# Altium PCB CPU01(2).PcbDoc (part 1 of 2)
Units mm, origin at the board's own origin, x right, y up, seen from the top; angles counter-clockwise.
Board outline 153.03 x 96.97 mm, 4 copper layers (Top Layer, GND, VCC, Bottom Layer), stack 0.778 mm thick; 203 components, 157 nets, 813 pads, 622 vias.
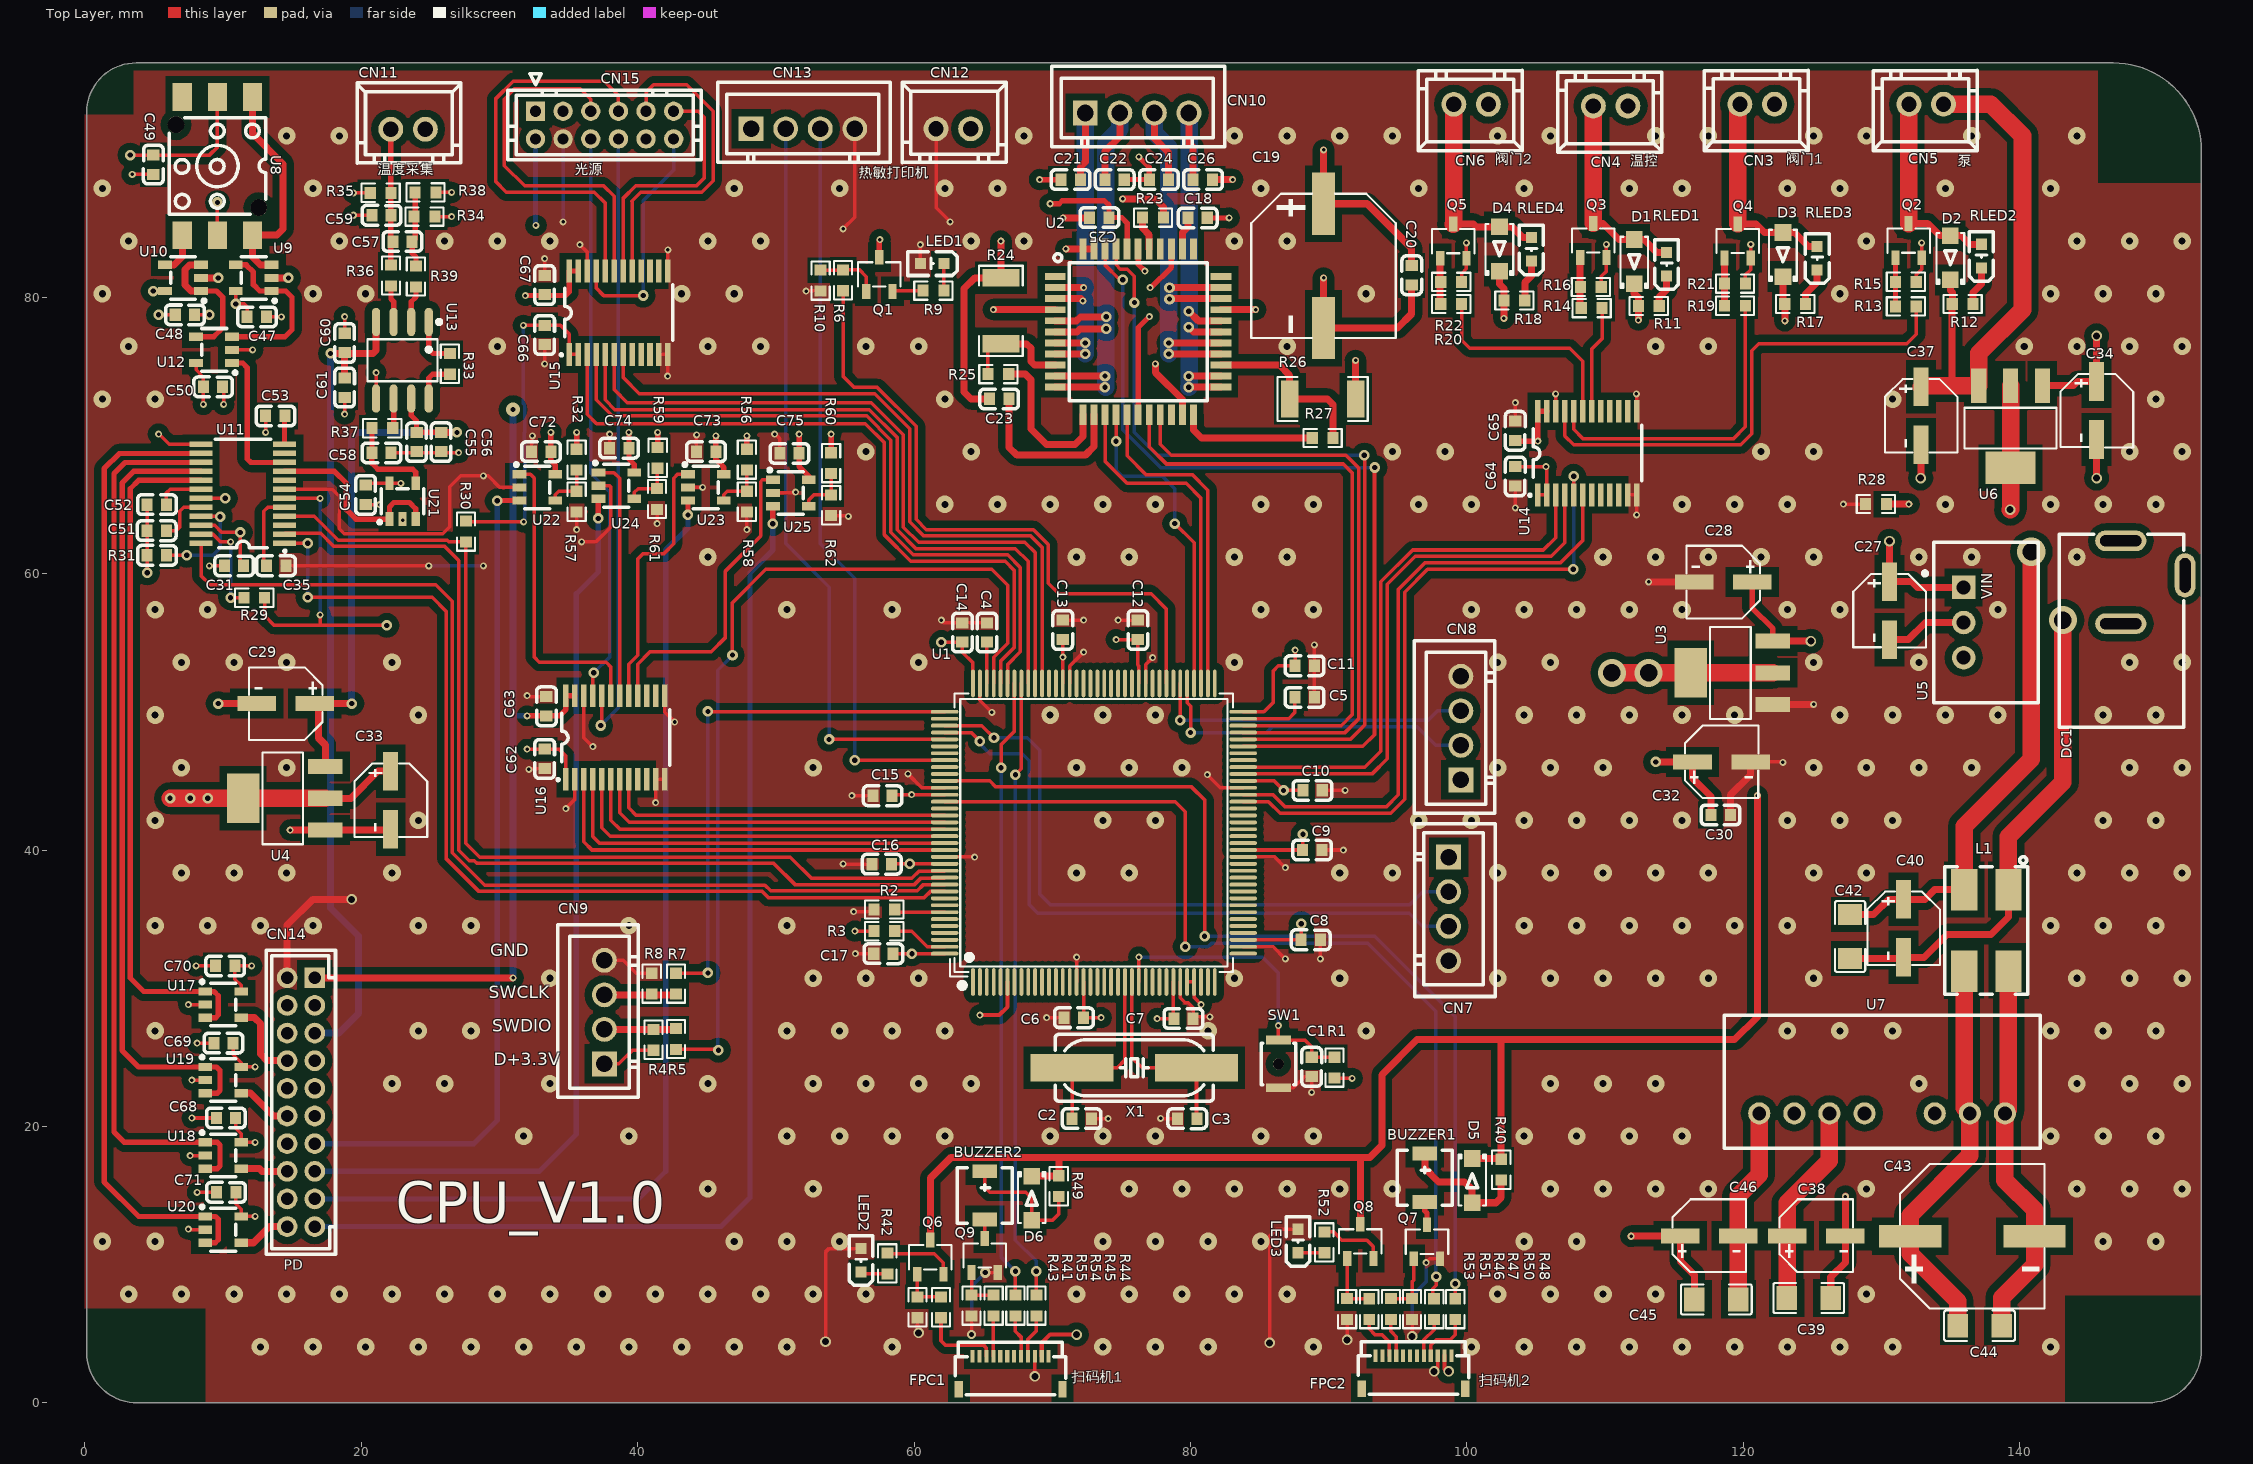
[diagram p0: Top Layer view]
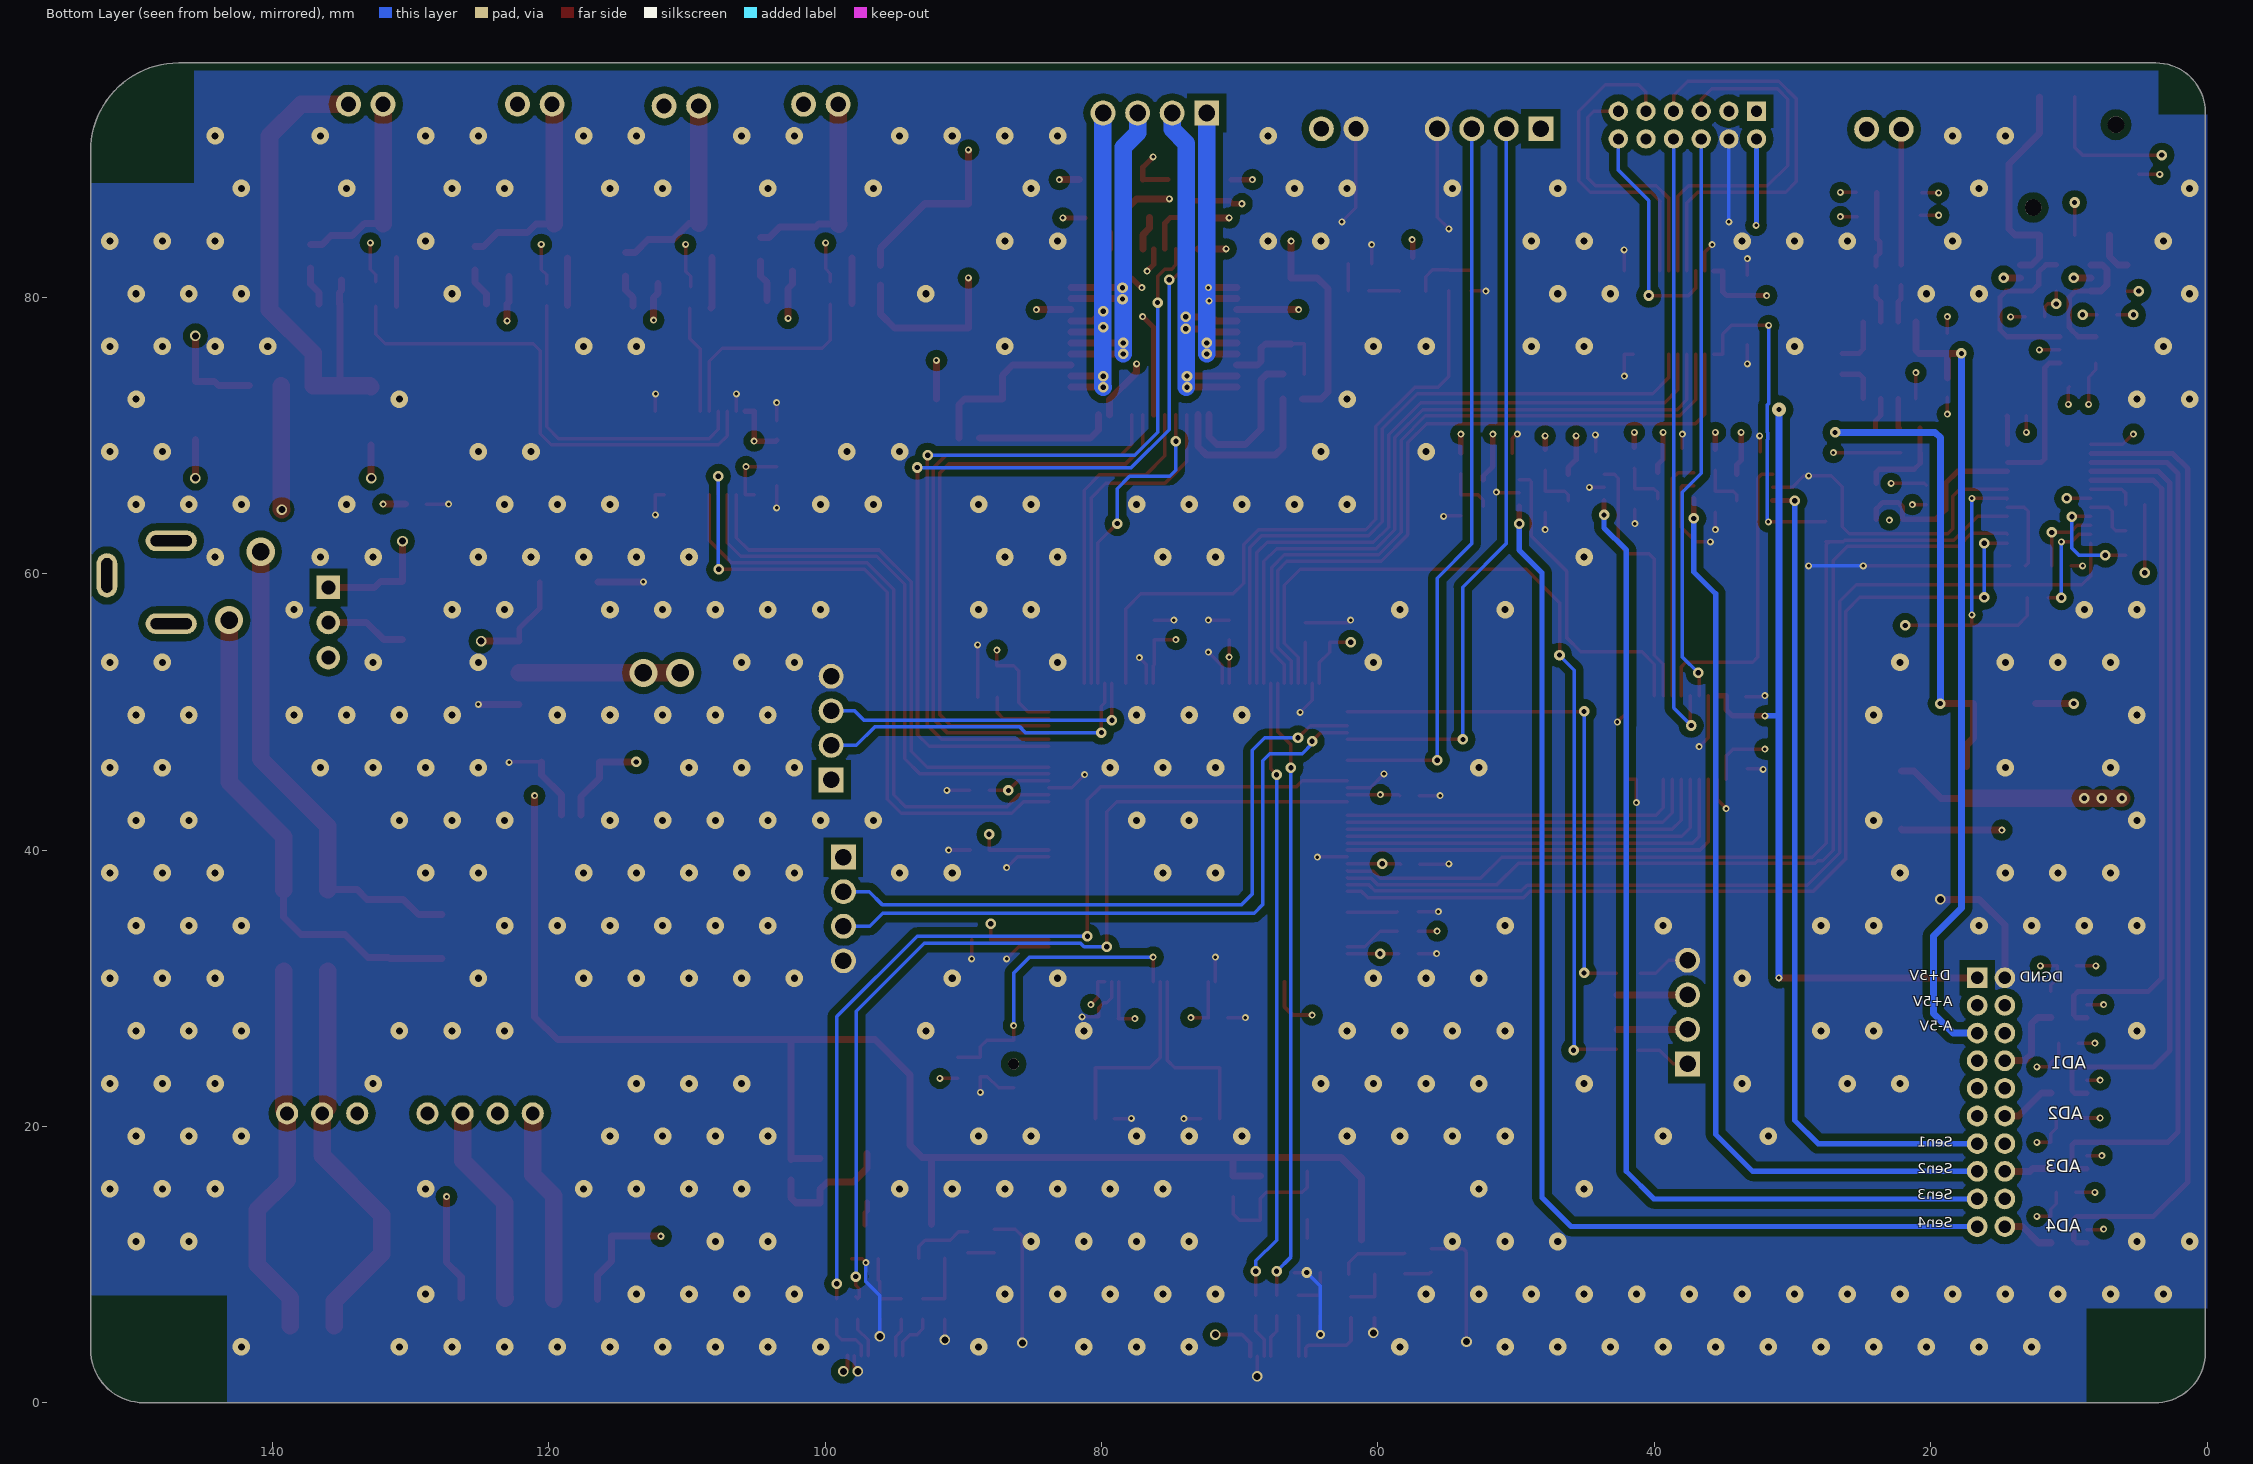
[diagram p1: Bottom Layer view, seen from below]
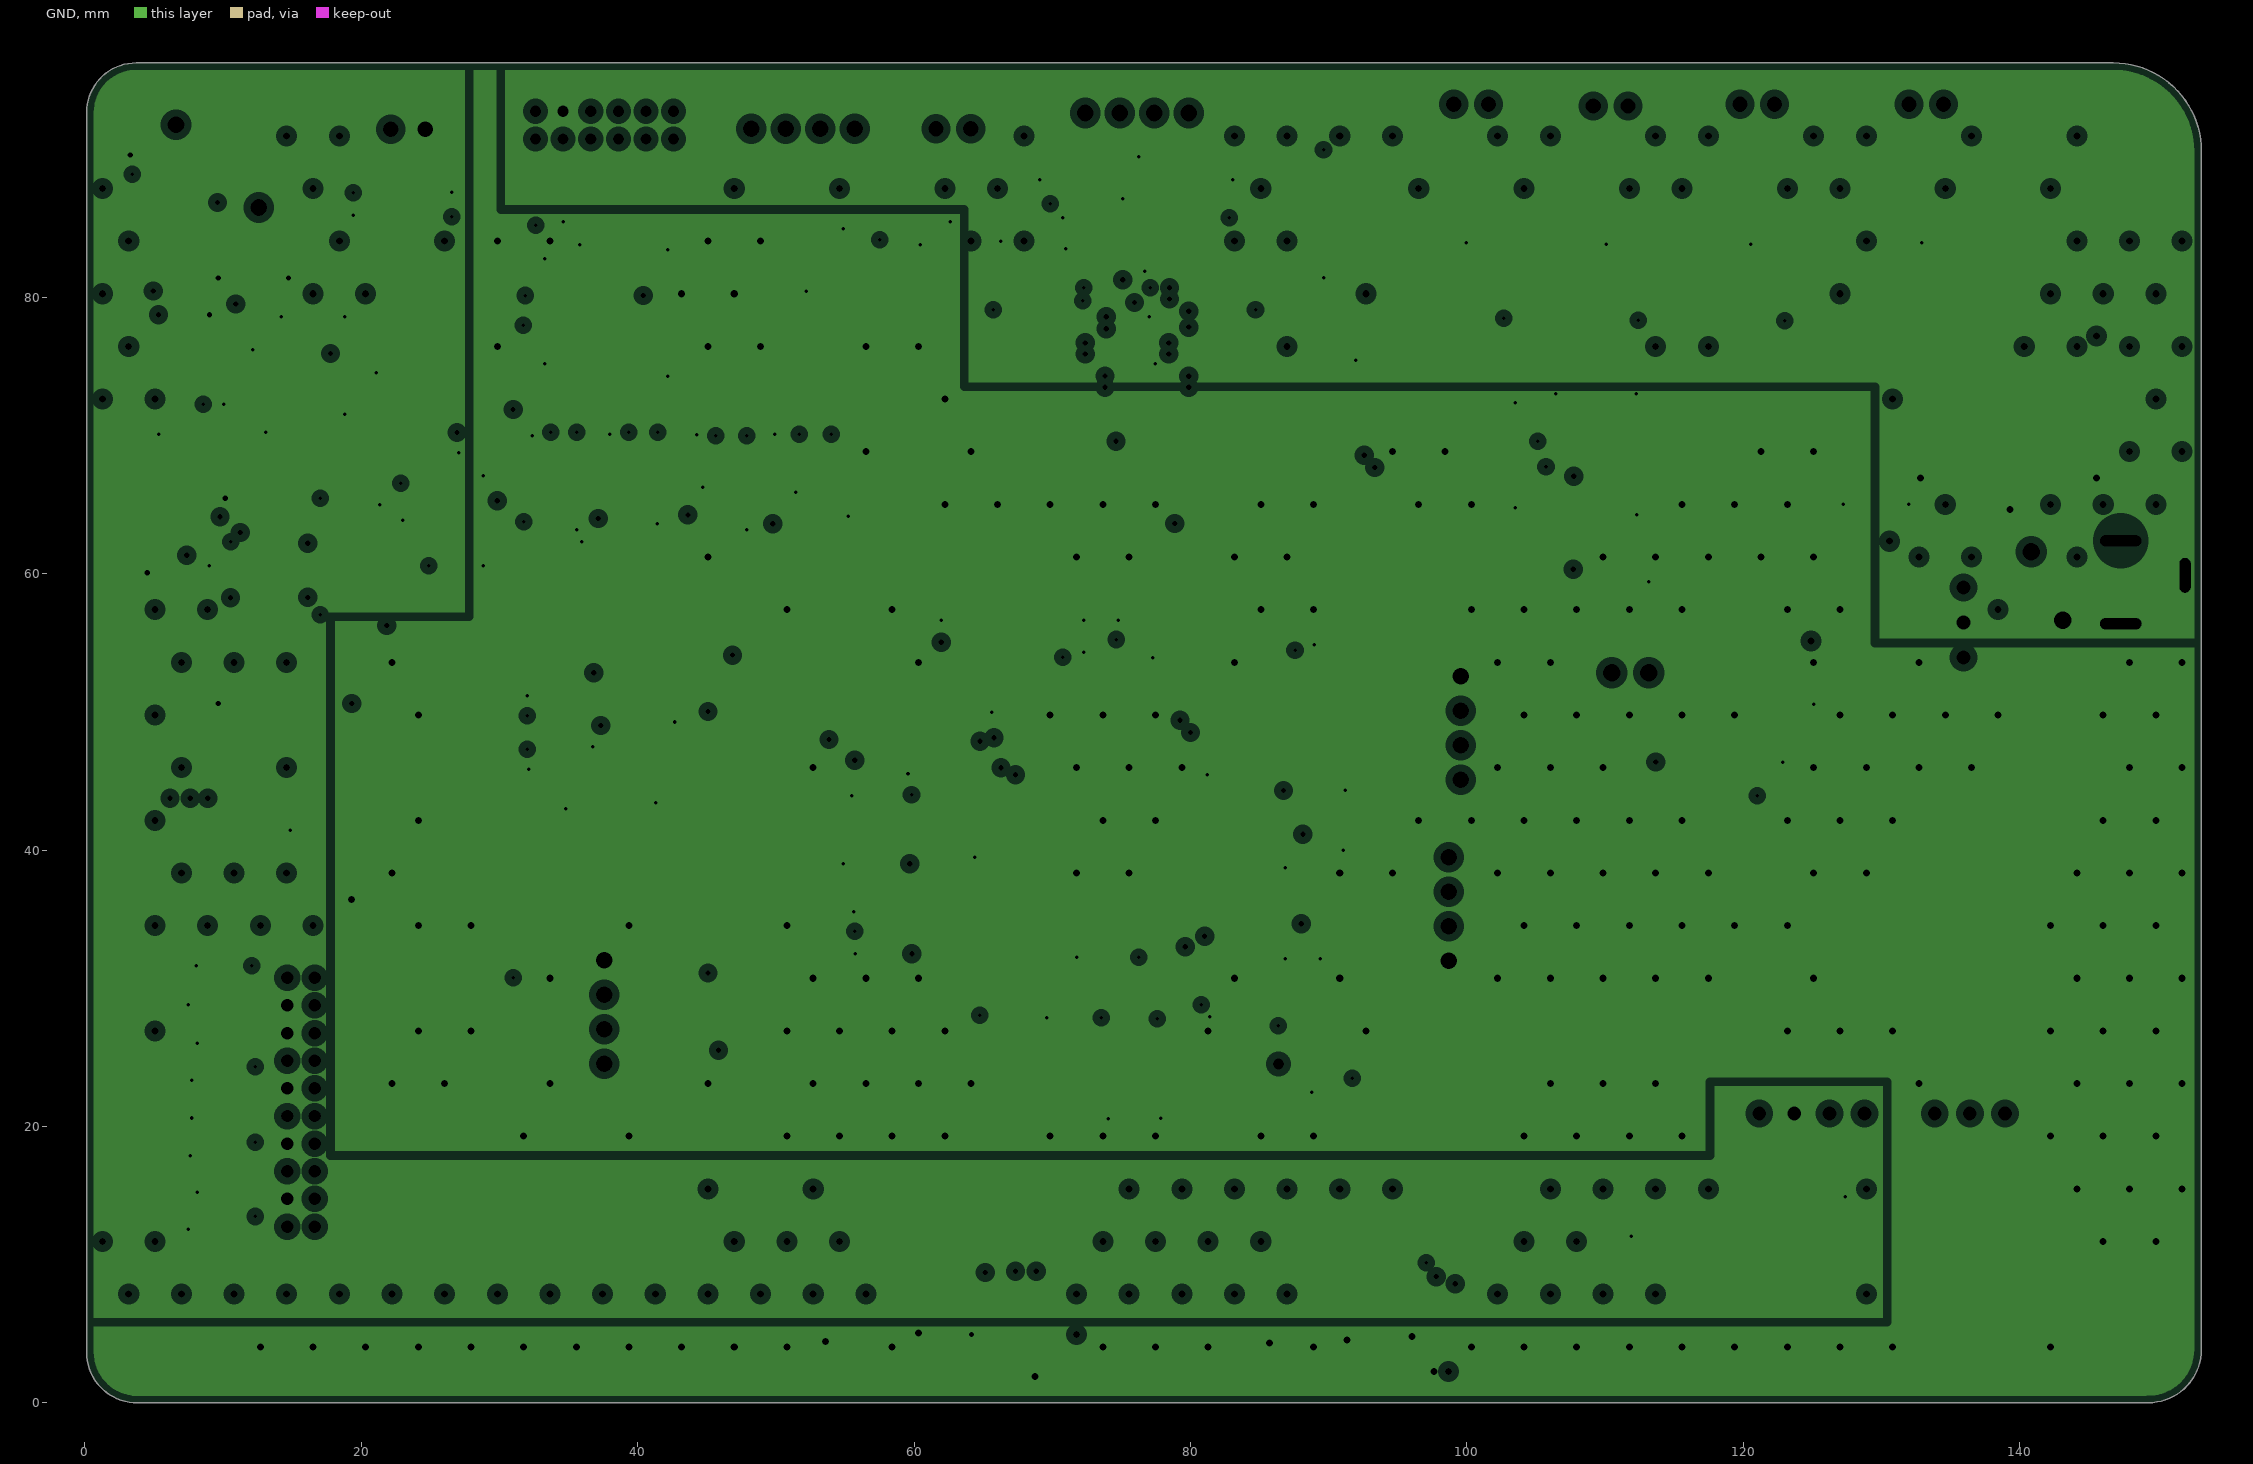
[diagram p2: GND, clearances drawn from the general rule]
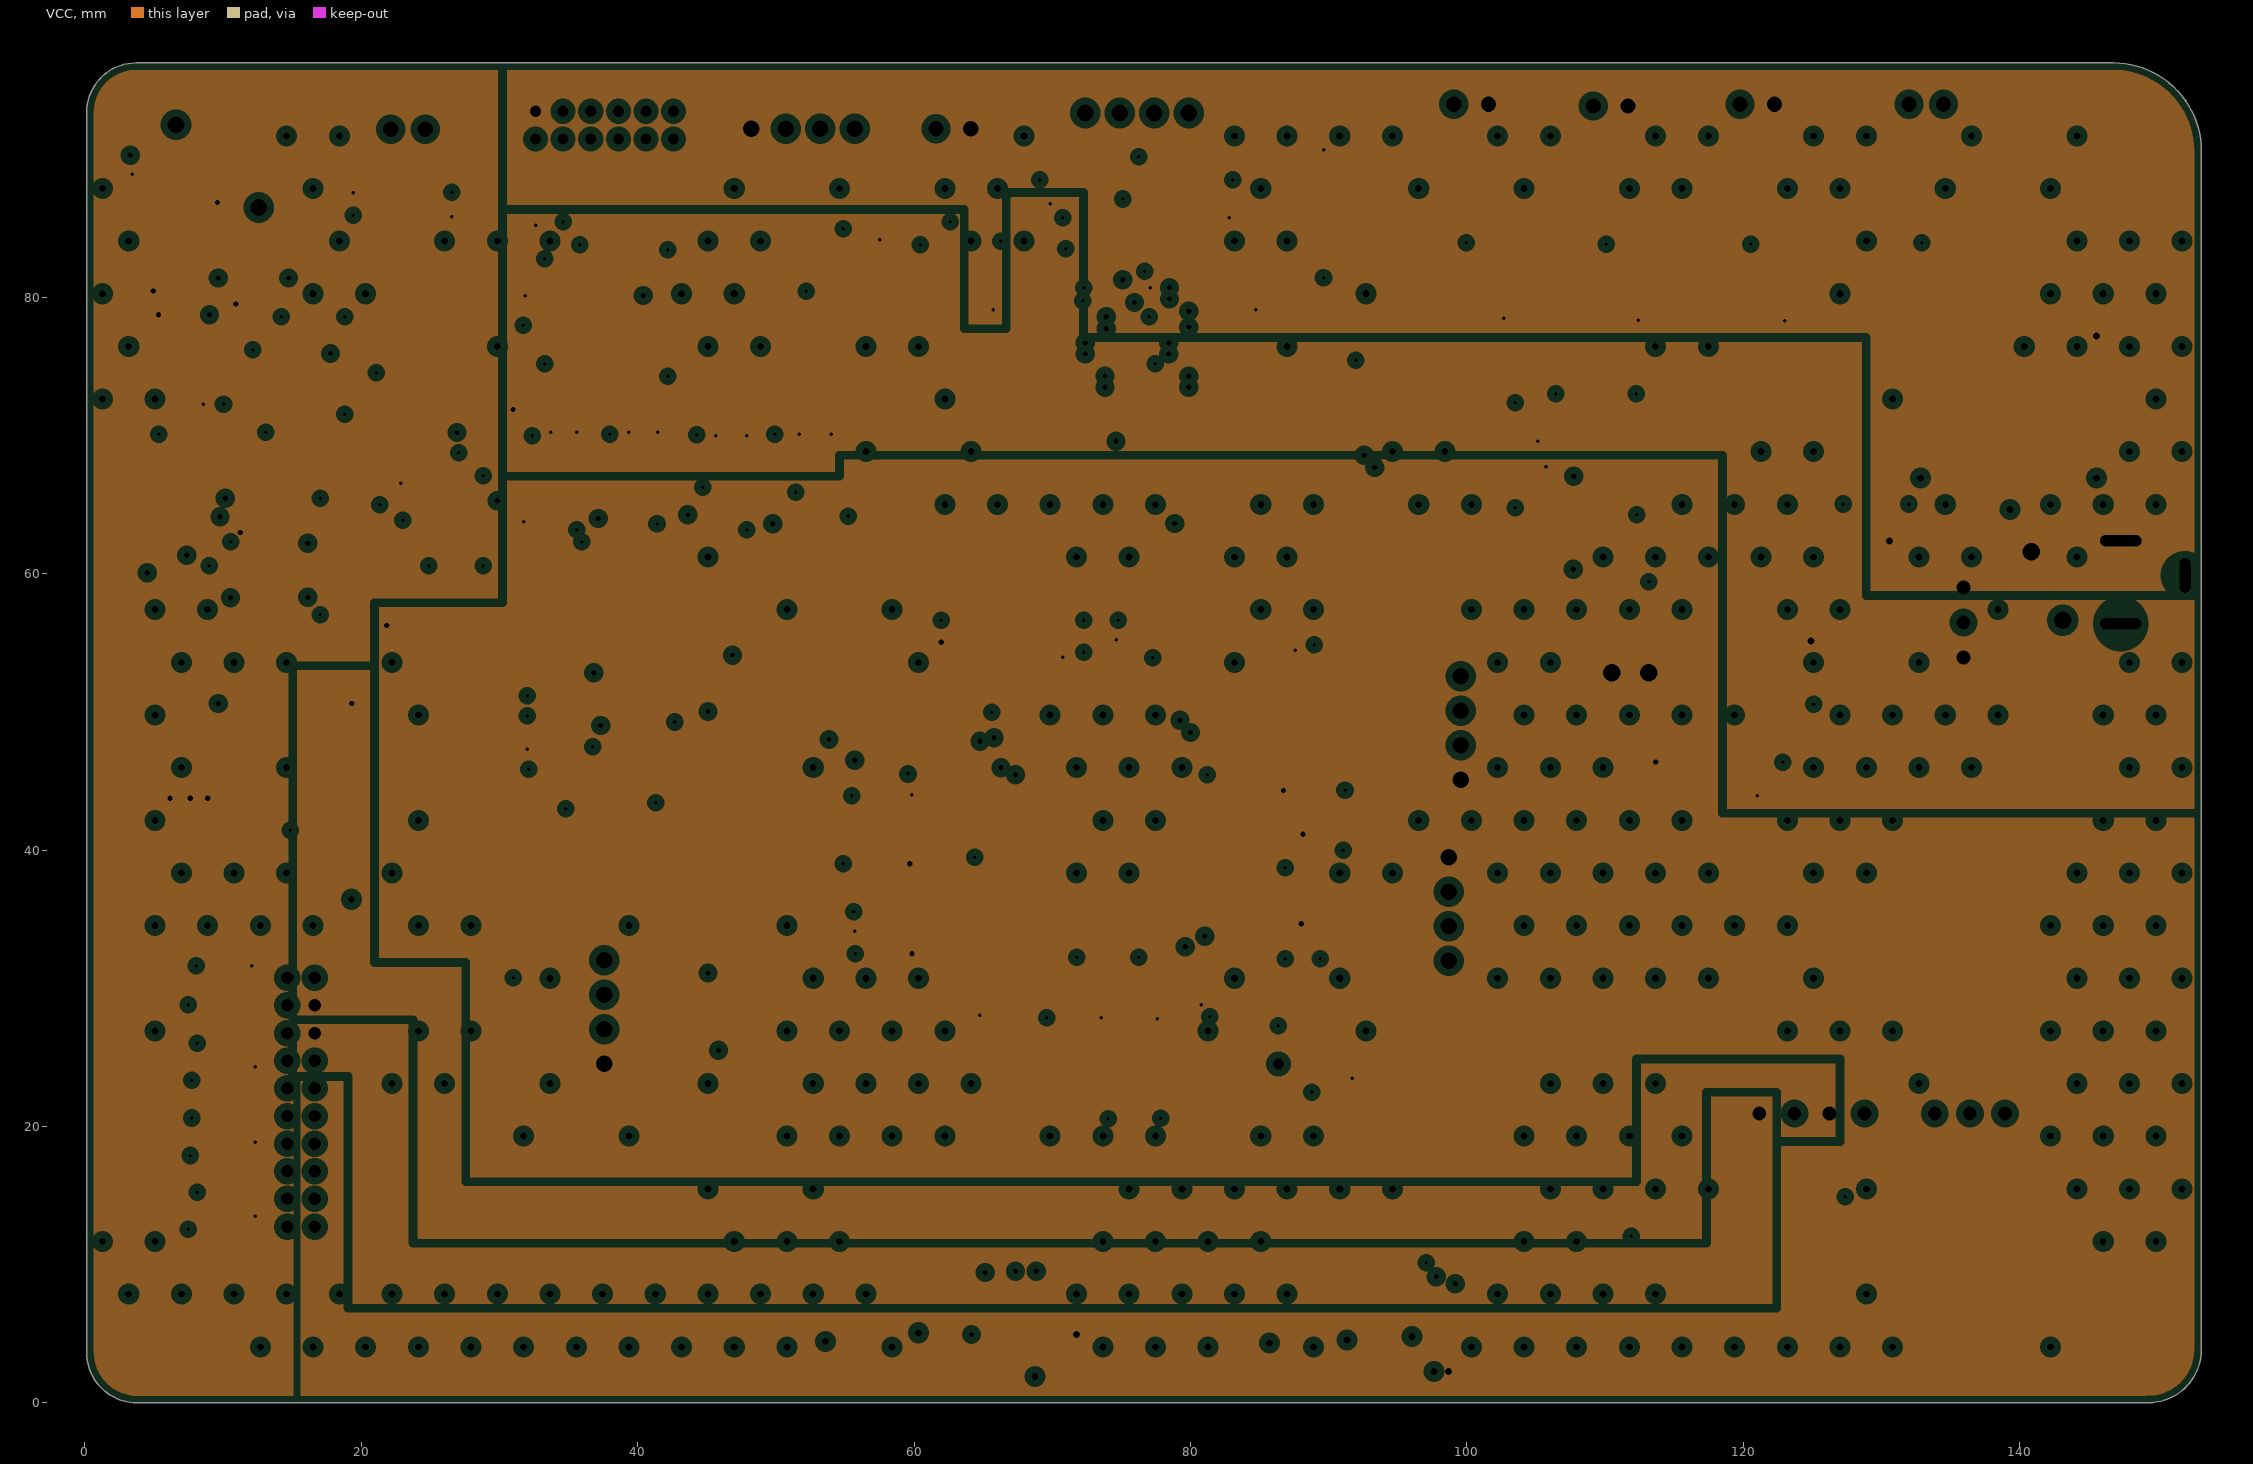
[diagram p3: VCC, clearances drawn from the general rule]

## Layer stack, top to bottom
Top Layer: signal copper 0.0356
Dielectric: core 0.254, FR-4, Dk 4.2
GND: plane copper 0.036, net (Multiple Nets)
Dielectric: prepreg 0.127, Dk 4.2
VCC: plane copper 0.036, net (Multiple Nets)
Dielectric: core 0.254, Dk 4.2
Bottom Layer: signal copper 0.0356

## Board outline
3.81,0 cw(c3.81,3.683) 0.127,3.683 0.127,93.383 cw(c3.716,93.383) 3.716,96.972 146.763,96.972 cw(c146.763,90.581) 153.154,90.581 153.154,3.866 cw(c149.308,3.866) 149.308,0.02 149.308,0

## Design rules (kind name [scope] priority, off if disabled: settings)
Clearance [All] p1: gap=0.508
ComponentClearance [All] p1: gap=0 collisioncheckmode=3 verticalgap=0 showdistances=FALSE
HoleToHoleClearance [All] p1: gap=0 allowstackedmicrovias=TRUE
MinimumSolderMaskSliver [All] p1: minsoldermaskwidth=0
PlaneClearance [All] p1: clearance=0.508
PlaneConnect [All] p1: planeconnectstyle=Direct reliefexpansion=0.508 reliefentries=4 reliefconductorwidth=0.254 reliefairgap=0.254
PolygonConnect [All] p1: connectstyle=Direct reliefconductorwidth=0.254 reliefentries=4 polygonreliefangle="90 Angle" airgapwidth=0.254
RoutingVias [All] p1: holewidth=0.381 width=0.762 viastyle="Through Hole" minholewidth=0.025 minwidth=0.025 maxholewidth=25.4 maxwidth=25.4
SilkToSilkClearance [All] p1: silktosilkclearance=0
SilkToSolderMaskClearance [IsPad] p1: minsilkscreentomaskgap=0 clearancetoexposedcopper=TRUE
SolderMaskExpansion [All] p1: expansion=0.102
Width [All] p1: maxlimit=25.4 minlimit=0.025 preferedwidth=0.254
21 further rules are at their usual default settings.

## Classes and differential pairs
component class Cnt: BUZZER1 BUZZER2 CN12 CN13 CN14 CN15 D5 D6 FPC1 FPC2 LED2 LED3 Q6 Q7 Q8 Q9 R40 R41 R42 R43 R44 R45 R46 R47 R48 R49 R50 R51 R52 R53 R54 R55
component class CPU: C1 C2 C3 C4 C5 C6 C7 C8 C9 C10 C11 C12 C13 C14 C15 C16 C17 CN7 CN8 CN9 LED1 Q1 R1 R2 R3 R4 R5 R6 R7 R8 R9 R10 SW1 U1 X1
component class FunCon: CN3 CN4 CN5 CN6 D1 D2 D3 D4 Q2 Q3 Q4 Q5 R11 R12 R13 R14 R15 R16 R17 R18 R19 R20 R21 R22 RLED1 RLED2 RLED3 RLED4
component class motor: C18 C19 C20 C21 C22 C23 C24 C25 C26 CN10 R23 R24 R25 R26 R27 U2
component class POWER: C27 C28 C29 C30 C31 C32 C33 C34 C37 C38 C39 C40 C42 C43 C44 C45 C46 DC1 L1 R28 U3 U4 U5 U6 U7
component class TempPress: C47 C48 C49 C50 C55 C56 C57 C58 C59 C60 C61 CN11 R33 R34 R35 R36 R37 R38 R39 U8 U9 U10 U12 U13
component class io: C62 C63 C64 C65 C66 C67 C72 C73 C74 C75 R32 R56 R57 R58 R59 R60 R61 R62 U14 U15 U16 U22 U23 U24 U25
component class ad7124: C35 C51 C52 C53 C54 C68 C69 C70 C71 R29 R30 R31 U11 U17 U18 U19 U20 U21

## Components (designator, comment, footprint, x,y, rotation, side; value= is the part's Value field where it differs from the comment)
BUZZER1 "KLJ-4020" 蜂鸣器 97.116,16.383 r270 top
BUZZER2 "KLJ-4020" 蜂鸣器 65.278,15.113 r270 top
C1 "0.1uF/16V" C0603 88.773,24.319 r270 top
C2 "8P/16V" C0603 72.136,20.574 r0 top
C3 "8P/16V" C0603 79.764,20.574 r180 top
C4 "2.2u/16V" C0603 65.278,55.753 r90 top
C5 "2.2u/16V" C0603 88.265,51.054 r0 top
C6 "0.1u/16V" C0603 71.566,27.879 r180 top
C7 "0.1u/16V" C0603 79.502,27.813 r0 top
C8 "0.1u/16V" C0603 88.711,33.514 r0 top
C9 "0.1u/16V" C0603 88.814,40.014 r0 top
C10 "0.1u/16V" C0603 88.838,44.323 r0 top
C11 "0.1u/16V" C0603 88.268,53.34 r0 top
C12 "0.1u/16V" C0603 76.2,55.945 r90 top
C13 "0.1u/16V" C0603 70.764,55.945 r90 top
C14 "0.1u/16V" C0603 63.5,55.753 r90 top
C15 "0.1u/16V" C0603 57.72,43.942 r180 top
C16 "0.1u/16V" C0603 57.658,38.989 r180 top
C17 "0.1u/16V" C0603 57.785,32.514 r180 top
C18 "0.22uF/50V" C0603 80.518,85.75 r180 top
C19 "50V/100uF" SMD,10x10.5mm 89.789,81.915 r270 top
C20 "0.22uF/50V" C0603 96.012,81.596 r270 top
C21 "100pF/50V" C0603 71.334,88.519 r0 top
C22 "100pF/50V" C0603 74.512,88.524 r180 top
C23 "1uF" C0603 66.167,72.651 r0 top
C24 "100pF/50V" C0603 77.724,88.519 r0 top
C25 "100nF" C0603 73.406,85.775 r180 top
C26 "100pF/50V" C0603 80.899,88.524 r180 top
C27 "22UF/25V" SMD,5x5.4mm 131.191,57.15 r270 top
C28 "10uF/16v" SMD,5x5.4mm 118.364,58.801 r180 top
C29 "10uF/16v" SMD,5x5.4mm 14.351,50.006 r180 top
C30 "0.1uF/16V" C0603 118.364,42.545 r0 top
C31 "0.1uF/16V" C0603 10.795,60.579 r180 top
C32 "10uF/16v" SMD,5x5.4mm 118.618,46.99 r0 top
C33 "10uF/16v" SMD,5x5.4mm 22.733,43.434 r270 top
C34 "22UF/25V" SMD,5x5.4mm 146.177,71.628 r270 top
C35 "0.1uF/16V" C0603 13.843,60.579 r0 top
C37 "10uF/16v" SMD,5x5.4mm 133.477,71.247 r270 top
C38 "100uF/16V" SMD,5x5.4mm 125.476,12.7 r0 top
C39 "10uF 10% 25V" C1206 124.968,7.112 r180 top
C40 "22UF/25V" SMD,5x5.4mm 132.207,34.163 r270 top
C42 "4.7uF 10% 50V" C1206 127.254,33.528 r90 top
C43 "330uF/50V" SMD,10x10.5mm 136.942,12.224 r0 top
C44 "10uF 10% 50V" C1206 137.328,5.106 r180 top
C45 "10uF 10% 25V" C1206 118.278,7.011 r180 top
C46 "100uF/16V" SMD,5x5.4mm 117.729,12.7 r0 top
C47 "0.1uF/50V" C0603 12.446,78.594 r180 top
C48 "100nF/10V" C0603 7.239,78.74 r180 top
C49 "0.1uF/50V" C0603 4.953,89.6 r270 top
C50 "0.1uF/50V" C0603 9.271,73.533 r180 top
C51 "0.1uF/16V" C0603 5.207,63.119 r0 top
C52 "0.1uF/16V" C0603 5.207,65.01 r180 top
C53 "0.1uF/16V" C0603 13.781,71.425 r180 top
C54 "0.1uF/50V" C0603 20.32,65.71 r90 top
C55 "0.01uF/50V" C0603 24.003,69.534 r90 top
C56 "0.1uF/16V" C0603 25.781,69.534 r90 top
C57 "0.1uF/16V" C0603 22.987,84.04 r0 top
C58 "5pF/16V" C0603 21.463,68.754 r180 top
C59 "0.1uF/16V" C0603 21.463,85.945 r180 top
C60 "0.01uF/16V" C0603 18.796,76.708 r90 top
C61 "0.1uF/16V" C0603 18.796,73.468 r270 top
C62 "0.01u/16V" C0603 33.274,46.609 r90 top
C63 "0.01u/16V" C0603 33.401,50.419 r90 top
C64 "0.01u/16V" C0603 103.505,67.056 r90 top
C65 "0.01u/16V" C0603 103.505,70.358 r90 top
C66 "0.01u/16V" C0603 33.274,77.281 r90 top
C67 "0.01u/16V" C0603 33.274,80.899 r90 top
C68 "0.1uF/50V" C0603 10.212,20.621 r0 top
C69 "0.1uF/50V" C0603 10.033,26.035 r0 top
C70 "0.1uF/50V" C0603 10.16,31.623 r0 top
C71 "0.1uF/50V" C0603 10.222,15.24 r0 top
C72 "0.1uF/50V" C0603 33.02,68.834 r0 top
C73 "0.1uF/50V" C0603 44.958,68.834 r0 top
C74 "0.1uF/50V" C0603 38.67,69.088 r0 top
C75 "0.1uF/50V" C0603 50.989,68.707 r0 top
CN3 "XH-2AW" XH-2P 121.272,92.748 r180 top
CN4 "XH-2AW" XH-2P 110.665,92.621 r180 top
CN5 "XH-2AW" XH-2P 133.502,92.748 r180 top
CN6 "XH-2AW" XH-2P 100.571,92.74 r180 top
CN7 "XH-4A" XH-4P 100.178,35.944 r270 top
CN8 "XH-4A" XH-4P 98.069,48.638 r90 top
CN9 "XH-4A" XH-4P 36.093,28.088 r90 top
CN10 "XH-4A" XH-4P 75.943,94.844 r0 top
CN11 "XH-2AW" XH-2P 23.127,93.4 r0 top
CN12 "XH-2AW" XH-2P 62.586,93.434 r0 top
CN13 "XH-4A" XH-4P 51.766,93.701 r0 top
CN14 "HC-PHD-2*10A" HC-PHD-2*10A 15.597,21.814 r90 top
CN15 "PHD-2x6A" PHD-2*6A 36.988,92.235 r180 top
D1 "SS14" SS24-SMA 112.047,82.42 r90 top
D2 "SS14" SS24-SMA 134.925,82.702 r90 top
D3 "SS14" SS24-SMA 122.809,82.931 r90 top
D4 "SS14" SS24-SMA 102.295,83.339 r90 top
D5 "SS14" SS24-SMA 100.457,16.256 r270 top
D6 "SS14" SS24-SMA 68.58,14.986 r270 top
DC1 "DC-005-A250" DC-IN-TH_DC-005-A250 147.505,57.016 r90 top
FPC1 "FH34SRJ-12S-0.5SH(50)" FPC12P*0.5mm 66.294,2.159 r0 top
FPC2 "FH34SRJ-12S-0.5SH(50)" FPC12P*0.5mm 95.445,2.207 r0 top
L1 "700Ω SMD,7x6mm" SMD,7x6mm 137.894,34.446 r270 top
LED1 "LTST-C191TGKT" LED0603 61.341,82.55 r180 top
LED2 "LTST-C191TGKT" LED0603 56.261,10.287 r90 top
LED3 "LTST-C191TGKT" LED0603 87.884,11.684 r90 top
Q1 "S9014" SOT-23 57.658,81.788 r270 top
Q2 "IRLML0030TRPBF" SOT-23 132.131,84.226 r270 top
Q3 "IRLML0030TRPBF" SOT-23 109.32,84.234 r270 top
Q4 "IRLML0030TRPBF" SOT-23 119.761,84.201 r270 top
Q5 "IRLML0030TRPBF" SOT-23 99.187,84.193 r270 top
Q6 "S9014" SOT-23 61.341,10.668 r270 top
Q7 "S9014" SOT-23 97.282,11.784 r270 top
Q8 "S9014" SOT-23 92.456,11.811 r270 top
Q9 "S9014" SOT-23 65.278,10.795 r270 top
R1 "10KΩ" R0603 90.449,24.203 r270 top
R2 "1K/1%" R0603 57.785,35.687 r180 top
R3 "1K/1%" R0603 57.912,34.163 r0 top
R4 "4.7KΩ" R0603 41.173,26.219 r270 top
R5 "100R" R0603 42.799,26.273 r270 top
R6 "1KΩ" R0603 54.889,81.175 r270 top
R7 "100R" R0603 42.749,30.408 r90 top
R8 "4.7KΩ" R0603 41.046,30.283 r270 top
R9 "330Ω" R0603 61.341,80.464 r180 top
R10 "10K" R0603 53.213,81.28 r90 top
R11 "4.7k" R0603 113.103,79.35 r180 top
R12 "330R" R0603 135.814,79.502 r180 top
R13 "1K" R0603 131.831,79.375 r0 top
R14 "1KΩ ±1%" R0603 108.966,79.197 r180 top
R15 "NC" R0603 131.831,81.153 r0 top
R16 "NC" R0603 109.037,80.78 r0 top
R17 "4.7k" R0603 123.698,79.502 r180 top
R18 "4.7k" R0603 103.378,79.748 r180 top
R19 "1KΩ ±1%" R0603 119.341,79.372 r180 top
R20 "1KΩ ±1%" R0603 98.806,79.494 r180 top
R21 "NC" R0603 119.468,81.023 r0 top
R22 "NC" R0603 98.933,81.145 r0 top
R23 "470R" R0603 77.225,85.75 r180 top
R24 "0R15/0.5W" R2010 65.913,78.867 r90 top
R25 "10R" R0603 66.04,74.422 r180 top
R26 "0R15/0.5W" R2010 89.408,73.025 r0 top
R27 "10R" R0603 89.63,69.85 r0 top
R28 "0R" R0603 129.54,65.024 r180 top
R29 "4.7KΩ" R0603 12.319,58.293 r0 top
R30 "4.7KΩ" R0603 27.559,63.119 r90 top
R31 "0R" C0603 5.207,61.341 r180 top
R32 "100Ω" R0603 35.56,68.326 r90 top
R33 "12KΩ 0.1%" R0603 26.391,75.255 r90 top
R34 "6.8KΩ 0.1%" R0603 24.511,85.818 r180 top
R35 "6.8KΩ 0.1%" R0603 21.463,87.596 r0 top
R36 "1KΩ" R0603 22.178,81.525 r270 top
R37 "1KΩ" R0603 21.463,70.51 r180 top
R38 "330Ω 0.1%" R0603 24.715,87.621 r0 top
R39 "1KΩ" R0603 23.981,81.454 r270 top
R40 "100Ω" R0603 102.464,16.945 r90 top
R41 "1KΩ" R0603 61.976,6.858 r270 top
R42 "330Ω" R0603 58.039,10.16 r90 top
R43 "10K" R0603 60.225,6.985 r90 top
R44 "1K/1%" R0603 68.885,6.985 r270 top
R45 "1K/1%" R0603 67.361,6.985 r270 top
R46 "1KΩ" R0603 94.537,6.733 r270 top
R47 "10K" R0603 96.012,6.858 r90 top
R48 "1K/1%" R0603 99.187,6.731 r270 top
R49 "100Ω" R0603 70.447,15.748 r90 top
R50 "1K/1%" R0603 97.663,6.731 r270 top
R51 "1KΩ" R0603 92.964,6.731 r270 top
R52 "330Ω" R0603 89.662,11.684 r90 top
R53 "10K" R0603 91.313,6.858 r90 top
R54 "1KΩ" R0603 65.786,6.985 r270 top
R55 "10K" R0603 64.135,7.112 r90 top
R56 "100Ω" R0603 47.879,68.326 r90 top
R57 "100Ω" R0603 35.56,65.278 r90 top
R58 "100Ω" R0603 47.879,65.278 r90 top
R59 "100Ω" R0603 41.427,68.453 r90 top
R60 "100Ω" R0603 53.975,68.072 r90 top
R61 "100Ω" R0603 41.377,65.476 r90 top
R62 "100Ω" R0603 53.975,65.024 r90 top
RLED1 "LTST-C191TGKT" LED0603 114.554,82.372 r90 top
RLED2 "LTST-C191TGKT" LED0603 137.338,82.956 r90 top
RLED3 "LTST-C191TGKT" LED0603 125.451,82.804 r90 top
RLED4 "LTST-C191TGKT" LED0603 104.775,83.431 r90 top
SW1 "K2-1822SN-A3DW-06" SW1 86.34,24.517 r90 top
U1 "STM32F407ZET6" LQFP-144_L20.0-W20.0-P0.50-LS22.0-BL 72.136,41.783 r0 top
U2 "TMC2660" QFP-44 76.835,77.527 r270 top
U3 "AMS1117-3.3" SOT-223 119.353,53.113 r0 top
U4 "AMS1117-3.3" SOT-223 14.605,44.037 r0 top
U5 "K7805-500R3_C909662" K7805-500R3 137.541,55.753 r90 top
U6 "78D05G-AA3-R" SOT-223 139.065,70.822 r90 top
U7 "WRA1205S-3WR2" WRA1205S-3WR2 130.429,22.352 r180 top
U8 "MPS-3118-015GC" SMD 9.652,89.662 r270 top
U9 "OPA348AIDBVRG4" SOT-23-5 12.065,81.407 r0 top
U10 "OPA348AIDBVRG4" SOT-23-5 6.954,81.407 r0 top
U11 "AD7124-4BRUZ" TSSOP-24 11.43,65.786 r90 top
U12 "OPA348AIDBVRG4" SOT-23-5 9.202,76.2 r0 top
U13 "INA129UA/2K5" SOIC-8 23.368,75.311 r180 top
U14 "SN74LVC8T245PWR" TSSOP-24 108.708,68.732 r0 top
U15 "SN74LVC8T245PWR" TSSOP-24 38.619,78.892 r0 top
U16 "SN74LVC8T245PWR" TSSOP-24 38.38,48.158 r0 top
U17 "OPA348AIDBVRG4" SOT-23-5 10.16,28.829 r180 top
U18 "OPA348AIDBVRG4" SOT-23-5 10.16,17.907 r180 top
U19 "OPA348AIDBVRG4" SOT-23-5 10.16,23.368 r180 top
U20 "OPA348AIDBVRG4" SOT-23-5 10.16,12.545 r180 top
U21 "OPA348AIDBVRG4" SOT-23-5 22.987,65.405 r270 top
U22 "OPA348AIDBVRG4" SOT-23-5 32.893,66.247 r180 top
U23 "OPA348AIDBVRG4" SOT-23-5 45.085,66.247 r180 top
U24 "OPA348AIDBVRG4" SOT-23-5 38.608,66.374 r180 top
U25 "OPA348AIDBVRG4" SOT-23-5 51.233,65.847 r180 top
X1 "X49SM8MSD2SI" 晶振 75.946,24.257 r180 top

## Footprints (in the part's own frame and the unit in brackets; to place one, negate y for a bottom-side part, rotate by r counter-clockwise, add the part's x,y. Pads: shape width x height; smd on the part's side, far side on the other; paste and mask are expansions set on the pad)
C0603 [mm]
  rect 0.8x0.9 smd: 1(-0.7,0) 2(0.7,0)
  silkscreen extent -1.41,-0.71 1.39,0.72
C1206 [mm]
  rect 1.485x1.728 smd: 1(-1.366,-0.482) 2(1.819,-0.482)
  silkscreen extent -2.34,-1.57 2.79,0.61
DC-IN-TH_DC-005-A250 [mm]
  oval 1.5x3.7 hole 0.8 slot 3 at 90 deg: 1(5.372,0.185) 2(-0.628,0.185)
  oval 3.2x1.5 hole 0.8 slot 2.5 at 0 deg: 3(2.872,-4.465)
  silkscreen extent -8.13,-4.39 5.84,4.63
FPC12P*0.5mm [mm]
  rect 0.3x0.9 smd: 1(3.448,1.222) 2(2.948,1.222) 3(2.448,1.222) 4(1.948,1.222) 5(1.448,1.222) 6(0.948,1.222) 7(0.448,1.222) 8(-0.052,1.222) 9(-0.552,1.222) 10(-1.052,1.222) 11(-1.552,1.222) 12(-2.052,1.222)
  rect 0.6x1.2 smd: 13(-3.052,-1.178) 14(4.448,-1.178)
  silkscreen extent -3.3,-1.58 4.7,2.22
HC-PHD-2*10A [mm]
  rect 1.5x1.5 hole 0.9: 1(8.951,-1.04)
  round 1.5 hole 0.9: 2(8.951,0.96) 3(6.951,-1.04) 4(6.951,0.96) 5(4.951,-1.04) 6(4.951,0.96) 7(2.951,-1.04) 8(2.951,0.96) 9(0.951,-1.04) 10(0.951,0.96) 11(-1.049,-1.04) 12(-1.049,0.96) 13(-3.049,-1.04) 14(-3.049,0.96) 15(-5.049,-1.04) 16(-5.049,0.96) 17(-7.049,-1.04) 18(-7.049,0.96) 19(-9.049,-1.04) 20(-9.049,0.96)
  silkscreen extent -11.05,-2.54 10.95,2.46
K7805-500R3 [mm]
  rect 1.7x1.7 hole 1: 1(3.26,1.59)
  round 1.7 hole 1: 2(0.72,1.59) 3(-1.82,1.59)
  silkscreen extent -5.08,-3.81 6.52,4.53
LED0603 [mm]
  rect 0.8x0.8 smd: 1(0.889,0.102) 2(-0.813,0.102)
  silkscreen extent -1.78,-0.76 1.8,0.97
LQFP-144_L20.0-W20.0-P0.50-LS22.0-BL [mm]
  oval 0.28x2 smd: 1(-7.872,-11.319) 2(-7.372,-11.319) 3(-6.872,-11.319) 4(-6.372,-11.319) 5(-5.872,-11.319) 6(-5.372,-11.319) 7(-4.872,-11.319) 8(-4.372,-11.319) 9(-3.872,-11.319) 10(-3.372,-11.319) 11(-2.872,-11.319) 12(-2.372,-11.319) 13(-1.872,-11.319) 14(-1.372,-11.319) 15(-0.872,-11.319) 16(-0.372,-11.319) 17(0.128,-11.319) 18(0.628,-11.319) 19(1.128,-11.319) 20(1.628,-11.319) 21(2.128,-11.319) 22(2.628,-11.319) 23(3.128,-11.319) 24(3.628,-11.319) 25(4.128,-11.319) 26(4.628,-11.319) 27(5.128,-11.319) 28(5.628,-11.319) 29(6.128,-11.319) 30(6.628,-11.319) 31(7.128,-11.319) 32(7.628,-11.319) 33(8.128,-11.319) 34(8.628,-11.319) 35(9.128,-11.319) 36(9.628,-11.319) 73(9.628,10.281) 74(9.128,10.281) 75(8.628,10.281) 76(8.128,10.281) 77(7.628,10.281) 78(7.128,10.281) 79(6.628,10.281) 80(6.128,10.281) 81(5.628,10.281) 82(5.128,10.281) 83(4.628,10.281) 84(4.128,10.281) 85(3.628,10.281) 86(3.128,10.281) 87(2.628,10.281) 88(2.128,10.281) 89(1.628,10.281) 90(1.128,10.281) 91(0.628,10.281) 92(0.128,10.281) 93(-0.372,10.281) 94(-0.872,10.281) 95(-1.372,10.281) 96(-1.872,10.281) 97(-2.372,10.281) 98(-2.872,10.281) 99(-3.372,10.281) 100(-3.872,10.281) 101(-4.372,10.281) 102(-4.872,10.281) 103(-5.372,10.281) 104(-5.872,10.281) 105(-6.372,10.281) 106(-6.872,10.281) 107(-7.372,10.281) 108(-7.872,10.281)
  oval 2x0.28 smd: 37(11.678,-9.269) 38(11.678,-8.769) 39(11.678,-8.269) 40(11.678,-7.769) 41(11.678,-7.269) 42(11.678,-6.769) 43(11.678,-6.269) 44(11.678,-5.769) 45(11.678,-5.269) 46(11.678,-4.769) 47(11.678,-4.269) 48(11.678,-3.769) 49(11.678,-3.269) 50(11.678,-2.769) 51(11.678,-2.269) 52(11.678,-1.769) 53(11.678,-1.269) 54(11.678,-0.769) 55(11.678,-0.269) 56(11.678,0.231) 57(11.678,0.731) 58(11.678,1.231) 59(11.678,1.731) 60(11.678,2.231) 61(11.678,2.731) 62(11.678,3.231) 63(11.678,3.731) 64(11.678,4.231) 65(11.678,4.731) 66(11.678,5.231) 67(11.678,5.731) 68(11.678,6.231) 69(11.678,6.731) 70(11.678,7.231) 71(11.678,7.731) 72(11.678,8.231) 109(-9.922,8.231) 110(-9.922,7.731) 111(-9.922,7.231) 112(-9.922,6.731) 113(-9.922,6.231) 114(-9.922,5.731) 115(-9.922,5.231) 116(-9.922,4.731) 117(-9.922,4.231) 118(-9.922,3.731) 119(-9.922,3.231) 120(-9.922,2.731) 121(-9.922,2.231) 122(-9.922,1.731) 123(-9.922,1.231) 124(-9.922,0.731) 125(-9.922,0.231) 126(-9.922,-0.269) 127(-9.922,-0.769) 128(-9.922,-1.269) 129(-9.922,-1.769) 130(-9.922,-2.269) 131(-9.922,-2.769) 132(-9.922,-3.269) 133(-9.922,-3.769) 134(-9.922,-4.269) 135(-9.922,-4.769) 136(-9.922,-5.269) 137(-9.922,-5.769) 138(-9.922,-6.269) 139(-9.922,-6.769) 140(-9.922,-7.269) 141(-9.922,-7.769) 142(-9.922,-8.269) 143(-9.922,-8.769) 144(-9.922,-9.269)
  silkscreen extent -9.54,-11.77 10.95,9.56
PHD-2*6A [mm]
  rect 1.4x1.4 hole 0.8: 1(4.38,-1.237)
  round 1.4 hole 0.8: 2(2.38,-1.237) 3(0.38,-1.237) 4(-1.62,-1.237) 5(-3.62,-1.237) 6(-5.62,-1.237) 7(4.38,0.763) 8(2.38,0.763) 9(0.38,0.763) 10(-1.62,0.763) 11(-3.62,0.763) 12(-5.62,0.763)
  silkscreen extent -7.62,-3.94 6.38,2.26
QFP-44 [mm]
  rect 0.5x1.5 smd: 1(-3.981,-6.616) 2(-3.181,-6.616) 3(-2.381,-6.616) 4(-1.581,-6.616) 5(-0.781,-6.616) 6(0.019,-6.616) 7(0.819,-6.616) 8(1.619,-6.616) 9(2.419,-6.616) 10(3.219,-6.616) 11(4.019,-6.616) 23(4.019,5.384) 24(3.219,5.384) 25(2.419,5.384) 26(1.619,5.384) 27(0.819,5.384) 28(0.019,5.384) 29(-0.781,5.384) 30(-1.581,5.384) 31(-2.381,5.384) 32(-3.181,5.384) 33(-3.981,5.384)
  rect 1.5x0.5 smd: 12(6.019,-4.616) 13(6.019,-3.816) 14(6.019,-3.016) 15(6.019,-2.216) 16(6.019,-1.416) 17(6.019,-0.616) 18(6.019,0.184) 19(6.019,0.984) 20(6.019,1.784) 21(6.019,2.584) 22(6.019,3.384) 34(-5.981,3.384) 35(-5.981,2.584) 36(-5.981,1.784) 37(-5.981,0.984) 38(-5.981,0.184) 39(-5.981,-0.616) 40(-5.981,-1.416) 41(-5.981,-2.216) 42(-5.981,-3.016) 43(-5.981,-3.816) 44(-5.981,-4.616)
  silkscreen extent -5.63,-6.71 5.02,4.38
R0603 [mm]
  rect 0.806x0.864 smd: 1(-0.816,-0.025) 2(0.691,-0.025)
  silkscreen extent -1.45,-0.69 1.32,0.64
R2010 [mm]
  rect 1.283x2.7 smd: 1(-2.229,-0.377) 2(2.554,-0.377)
  silkscreen extent -3.1,-1.96 3.42,1.2
SMD [mm]
  rect 2x1.4 smd: 1(5.158,2.484) 2(5.158,-0.056) 3(5.158,-2.596) 4(-4.842,-2.596) 5(-4.842,-0.056) 6(-4.842,2.484)
  round 1.2 hole 1.2 unplated: ""(-2.842,-3.056) ""(3.158,2.944)
  silkscreen extent -3.34,-3.56 3.66,3.45
SMD,5x5.4mm [mm]
  rect 2.8x1.1 smd: 1(-2.283,-0.607) 2(1.917,-0.607)
  silkscreen extent -2.84,-3.23 2.48,2.04
SMD,7x6mm [mm]
  rect 3x1.9 smd: 1(-2.696,1.298) 2(-2.696,-1.902) 3(3.204,-1.902) 4(3.204,1.298)
  silkscreen extent -5.08,-3.3 4.85,2.7
SMD,10x10.5mm [mm]
  rect 4.5x1.65 smd: 1(-4.862,-0.159) 2(4.138,-0.159)
  silkscreen extent -5.59,-5.38 4.86,5.07
SOIC-8 [mm]
  oval 0.588x2.045 smd: 1(-1.516,-2.914) 2(-0.246,-2.914) 3(1.024,-2.914) 4(2.294,-2.914) 5(2.294,2.631) 6(1.024,2.631) 7(-0.246,2.631) 8(-1.516,2.631)
  silkscreen extent -2.41,-3.06 2.91,1.38
SOT-23 [mm]
  rect 1.07x0.6 smd: 1(1.354,-1.116) 2(1.354,0.784) 3(-1.116,-0.166)
  silkscreen extent -0.76,-1.7 1,1.37
SOT-23-5 [mm]
  rect 1x0.6 smd: 1(1.449,-0.95) 2(1.449,0) 3(1.449,0.95) 4(-1.151,0.95) 5(-1.151,-0.95)
  silkscreen extent -0.75,-1.78 1.8,1.55
SOT-223 [mm]
  rect 2.5x1.1 smd: 1(2.792,-2.581) 2(2.792,-0.281) 3(2.792,2.019)
  rect 2.34x3.6 smd: 4(-3.148,-0.281)
  silkscreen extent -1.75,-3.61 1.19,3.05
SS24-SMA [mm]
  rect 1.2x1.2 smd: 1(-1.432,-0.067) 2(1.768,-0.067)
  silkscreen extent -1.73,-1.07 1.97,0.93
SW1 [mm]
  rect 0.65x1.8 smd: 1(-1.707,-0.02) 2(1.743,-0.02)
  round 0.8 hole 0.8 unplated: ""(0.018,-0.02)
  silkscreen extent -1.48,-1.27 1.52,1.23
TSSOP-24 [mm]
  rect 0.4x1.65 smd: 1(-3.575,-3.023) 2(-2.925,-3.023) 3(-2.275,-3.023) 4(-1.625,-3.023) 5(-0.975,-3.023) 6(-0.325,-3.023) 7(0.325,-3.023) 8(0.975,-3.023) 9(1.625,-3.023) 10(2.275,-3.023) 11(2.925,-3.023) 12(3.575,-3.023) 13(3.575,3.023) 14(2.925,3.023) 15(2.275,3.023) 16(1.625,3.023) 17(0.975,3.023) 18(0.325,3.023) 19(-0.325,3.023) 20(-0.975,3.023) 21(-1.625,3.023) 22(-2.275,3.023) 23(-2.925,3.023) 24(-3.575,3.023)
  silkscreen extent -4.24,-3.15 3.94,2.01
WRA1205S-3WR2 [mm]
  round 1.6 hole 1: 1(-8.509,1.397) 2(-5.969,1.397) 3(-3.429,1.397) 5(1.651,1.397) 6(4.191,1.397) 7(6.731,1.397) 8(9.271,1.397)
  silkscreen extent -11.05,-5.72 11.81,3.94
XH-2P [mm]
  round 1.8 hole 1.1: 1(-0.991,-1.232) 2(1.511,-1.232)
  silkscreen extent -3.43,-3.68 4.09,2.12
XH-4P [mm]
  rect 1.8x1.8 hole 1.199: 1(-3.553,-1.499)
  round 1.8 hole 1.199: 2(-1.053,-1.499) 3(1.447,-1.499) 4(3.947,-1.499)
  silkscreen extent -5.97,-3.94 6.53,1.88
晶振 [mm]
  rect 6x2 smd: 1(-4.493,0) 2(4.507,0)
  silkscreen extent -5.71,-2.41 5.72,2.41
蜂鸣器 [mm]
  rect 1x1.8 smd: 1(-1.659,-0.159) 2(1.841,-0.159)
  silkscreen extent -1.91,-2.16 2.09,1.84

## Part data
C1 C6 C7 C8 C9 C10 C11 C12 C13 C14 C15 C16 C17 C30 C31 C57 C59: library part "CAP NP 0805"
C2 C3 C4 C5 C62 C63 C64 C65 C66 C67: library part "CAP NP 0805", "0.1u/16V"
C18 C20 C21 C22 C23 C24 C25 C26 C35 C39 C42 C44 C45 C51 C52 C53 C55 C56 C58 C60 C61: library part "0402 10nF (103) 10% 50V", "贴片电容"
C19 C38 C43 C46: library part "100uF 16V", "电解电容"
C27 C34 C40: library part RVT22UF25V67RV0047
C28 C29 C32 C33 C37: library part 22uF
C47 C48 C49 C50 C54 C68 C69 C70 C71 C72 C73 C74 C75: library part Cap, "Capacitor"
D1 D2 D3 D4 D5 D6: library part SS24AD
L1: library part Sunltech
Q2 Q3 Q4 Q5: library part IRF3205, "HEXFET Power MOSFET"
R1 R6 R9 R10 R32 R40 R41 R42 R43 R46 R47 R49 R51 R52 R53 R54 R55 R56 R57 R58 R59 R60 R61 R62: library part "0603 1.5KΩ (1501) 1%", "贴片电阻"
R2 R3 R5 R7 R11 R12 R13 R17 R18 R28 R34 R35 R36 R37 R38 R39 R44 R45 R48 R50: library part "RES 0805"
R4 R8: library part RESISTOR_Dup1
R14 R15 R16 R19 R20 R21 R22 R23 R24 R25 R26 R27 R29 R30 R31: library part "0603 4.7Ω (4R70) 1%", "贴片电阻"
R33: library part "RES AXIAL0.3"
U2: library part TMC260
U13: library part AD620
X1: library part 49M-008000-FD4D14

## Via types
v1: diameter 1.27, hole 0.508, Top Layer to Bottom Layer, 360 vias
v2: diameter 0.508, hole 0.254, Top Layer to Bottom Layer, 161 vias
v3: diameter 0.762, hole 0.381, Top Layer to Bottom Layer, 79 vias
v4: diameter 0.762, hole 0.508, Top Layer to Bottom Layer, 16 vias
v5: diameter 2.032, hole 1.27, Top Layer to Bottom Layer, 4 vias
v6: diameter 1.016, hole 0.381, Top Layer to Bottom Layer, 1 vias
v7: diameter 0.635, hole 0.381, Top Layer to Bottom Layer, 1 vias

## Nets (pads, with @x,y where several pads share a name; then routed paths per layer and width w, separated by ;. In a path a pad name is that pad's centre, name@x,y a point inside that pad or via, vN(x,y) a via of type N, cw(c..) or ccw(c..) an arc to the next point about the centre after c; other vN are vias at no path point)
3.3V_BSen1: U1.127 U16.5 | length 28.6
  Top Layer w0.254: U16.5@37.405,45.136 37.405,41.616 38.007,41.014 U1.127@62.214,41.014
3.3V_BSen2: U1.126 U16.6 | length 27.4
  Top Layer w0.254: U16.6@38.055,45.136 38.055,42.179 38.72,41.514 U1.126@62.214,41.514
3.3V_BSen3: U1.125 U16.7 | length 26.2
  Top Layer w0.254: U16.7@38.705,45.136 38.705,42.702 39.393,42.014 U1.125@62.214,42.014
3.3V_BSen4: U1.124 U16.8 | length 25.2
  Top Layer w0.254: U16.8@39.355,45.136 39.355,43.068 39.909,42.514 U1.124@62.214,42.514
3.3V_HC_Test: U1.129 U16.3 | length 30.9
  Top Layer w0.254: U16.3@36.105,45.136 36.105,40.603 36.694,40.014 U1.129@62.214,40.014
3.3V_LED_Con1: U1.103 U15.4 | length 51.7
  Top Layer w0.254: U15.4@36.994,75.87 36.994,72.595 38.165,71.425 56.568,71.425 58.318,69.674 58.318,63.001 59.953,61.366 66.777,61.366 67.691,60.452 67.691,54.356 66.764,53.429 U1.103@66.764,52.064
3.3V_LED_Con2: U1.100 U15.5 | length 51.5
  Top Layer w0.254: U15.5@37.644,75.87 37.644,72.592 38.354,71.882 56.757,71.882 58.776,69.864 58.776,63.19 60.142,61.824 67.335,61.824 68.264,60.895 U1.100@68.264,52.064
3.3V_LED_Con3: U1.99 U15.6 | length 51.3
  Top Layer w0.254: U15.6@38.294,75.87 38.294,73.336 39.24,72.39 56.896,72.39 59.233,70.053 59.233,63.379 60.331,62.281 68.021,62.281 68.764,61.538 U1.99@68.764,52.064
3.3V_LED_Con4: U1.98 U15.7 | length 50.9
  Top Layer w0.254: U15.7@38.944,75.87 38.944,74.21 40.129,73.025 57.15,73.025 59.69,70.485 59.69,63.754 60.706,62.738 68.453,62.738 69.264,61.927 U1.98@69.264,52.064
3.3V_Light_SHDN: U1.104 U15.3 | length 52.4
  Top Layer w0.254: U15.3@36.344,75.87 36.344,71.546 37.024,70.866 56.48,70.866 57.861,69.485 57.861,62.811 59.763,60.909 66.587,60.909 67.234,60.263 67.234,54.661 66.264,53.691 U1.104@66.264,52.064
3.3V_MotorSen_1: U1.128 U16.4 | length 29.8
  Top Layer w0.254: U16.4@36.755,45.136 36.755,40.995 37.236,40.514 U1.128@62.214,40.514
3.3V_PUMB_Con1: U1.64 U14.3 | length 39.8
  Top Layer w0.254: U1.64@83.814,46.014 92.623,46.014 93.777,47.168 93.777,59.422 96.077,61.722 105.537,61.722 106.433,62.618 U14.3@106.433,65.71
3.3V_Tap_Con1: U1.63 U14.4 | length 41.1
  Top Layer w0.254: U1.63@83.814,45.514 93.139,45.514 94.234,46.609 94.234,59.233 96.266,61.265 106.096,61.265 107.083,62.252 U14.4@107.083,65.71
3.3V_Tap_Con2: U1.59 U14.5 | length 48.4
  Top Layer w0.254: U1.59@83.814,43.514 85.645,43.514 86.487,42.672 94.488,42.672 95.504,43.688 95.504,58.674 97.155,60.325 v3(107.696,60.325) ; U14.5@107.733,65.71 v3(107.733,67.056)
  Bottom Layer w0.254: v3(107.696,60.325) 107.733,60.362 v3(107.733,67.056)
3.3V_Tmep_Ccon1: U1.60 U14.6 | length 44.9
  Top Layer w0.254: U1.60@83.814,44.014 85.979,44.014 86.864,43.129 94.162,43.129 95.047,44.014 95.047,58.863 96.966,60.782 98.019,60.782 98.044,60.808 106.782,60.808 108.383,62.409 U14.6@108.383,65.71
5V_BSen1: CN14.13 U22.3 | length 60.3
  Top Layer w0.381: v3(29.845,65.278) 29.864,65.297 U22.3@31.444,65.297
  Bottom Layer w0.381: CN14.13@16.637,18.765 28.163,18.765 29.845,20.447 v3(29.845,65.278)
5V_BSen1I: U16.19 U22.1 | length 22
  Top Layer w0.254: U22.1@31.444,67.197 32.244,67.197 32.512,66.929 32.512,53.975 32.893,53.594 37.719,53.594 38.055,53.258 U16.19@38.055,51.181
5V_BSen2: CN14.15 U24.3 | length 66.7
  Top Layer w0.381: v3@37.159,64.008 U24.3@37.159,65.424
  Bottom Layer w0.381: CN14.15@16.637,16.765 32.894,16.765 35.56,19.431 35.56,58.547 37.159,60.146 v3(37.159,64.008)
5V_BSen2I: U16.18 U24.1 | length 17.4
  Top Layer w0.254: U24.1@37.159,67.324 38.286,67.324 38.705,66.905 U16.18@38.705,51.181
5V_BSen3: CN14.17 U23.3 | length 75.4
  Top Layer w0.381: v3@43.636,64.262 U23.3@43.636,65.297
  Bottom Layer w0.381: CN14.17@16.637,14.765 40.038,14.765 42.037,16.764 42.037,48.995 42.024,49.008 42.024,61.709 43.636,63.321 v3(43.636,64.262)
5V_BSen3I: U16.17 U23.1 | length 19.1
  Top Layer w0.254: U16.17@39.355,51.181 39.355,53.467 40.005,54.117 40.005,61.073 40.4,61.468 41.91,61.468 42.608,62.166 42.608,66.921 42.883,67.197 U23.1@43.636,67.197
5V_BSen4: CN14.19 U25.3 | length 83.1
  Top Layer w0.381: v3(49.784,63.627) U25.3@49.784,64.897
  Bottom Layer w0.381: CN14.19@16.637,12.765 46.039,12.765 48.133,14.859 48.133,60.071 49.784,61.722 v3(49.784,63.627)
5V_BSen4I: U16.16 U25.1 | length 22.7
  Top Layer w0.254: U16.16@40.005,51.181 40.005,53.467 40.894,54.356 45.325,54.356 46.355,55.386 46.355,60.198 48.895,62.738 48.895,66.67 49.022,66.797 U25.1@49.784,66.797
5V_HC_Test: CN15.9 U16.21 | length 41.7
  Top Layer w0.254: U16.21@36.755,51.181 36.755,52.757 v3(36.83,52.832)
  Bottom Layer w0.254: v3(36.83,52.832) 37.973,53.975 37.973,65.913 36.608,67.278 CN15.9@36.608,91.472 CN15.9@36.83,91.25
5V_LED_Con1: CN15.4 U15.20 | length 30.4
  Top Layer w0.254: U15.20@37.644,81.915 37.644,86.835 36.866,87.613 30.497,87.613 29.718,88.392 29.718,94.361 30.988,95.631 37.592,95.631 38.608,94.615 CN15.4@38.608,93.472
5V_LED_Con2: CN15.3 U15.19 | length 26.8
  Top Layer w0.254: CN15.3@36.608,93.472 36.608,94.329 35.852,95.085 31.089,95.085 30.353,94.349 30.353,89.535 31.818,88.07 37.533,88.07 38.294,87.309 U15.19@38.294,81.915
5V_LED_Con3: CN15.6 U15.18 | length 18.5
  Top Layer w0.254: U15.18@38.944,81.915 38.944,87.16 39.855,88.07 44.263,88.07 44.831,88.638 44.831,93.027 44.386,93.472 CN15.6@42.608,93.472
5V_LED_Con4: CN15.5 U15.17 | length 23.8
  Top Layer w0.254: U15.17@39.594,81.915 39.594,86.935 39.583,86.946 40.233,87.596 44.634,87.596 45.466,88.428 45.466,93.472 43.561,95.377 41.148,95.377 40.608,94.837 CN15.5@40.608,93.472
5V_Light_SHDN: CN15.12 U15.21 | length 17.2
  Top Layer w0.254: U15.21@36.994,81.915 36.994,80.676 37.533,80.137 v3(40.4,80.137)
  Bottom Layer w0.254: v3(40.4,80.137) 40.4,87.009 42.608,89.217 CN15.12@42.608,91.472 CN15.12@42.672,91.408
5V_Line_Motor_C\S\: U1.70 U2.18 | length 43.5
  Top Layer w0.254: U2.18@77.019,71.508 77.019,69.19 78.264,67.945 91.059,67.945 91.709,67.295 91.709,49.818 90.904,49.014 U1.70@83.814,49.014
5V_Line_Motor_DIR: U1.68 U2.41 | length 60.2
  Top Layer w0.254: U2.41@74.619,83.508 74.619,82.353 74.93,82.042 75.438,82.042 75.946,81.534 v3(75.946,79.629) ; U1.68@83.814,48.014 91.575,48.014 92.623,49.062 92.623,68.54 v3(92.583,68.58)
  Bottom Layer w0.254: v3(75.946,79.629) 75.946,70.231 77.597,68.58 v3(92.583,68.58)
5V_Line_Motor_EN: U1.69 U2.19 | length 44.1
  Top Layer w0.254: U2.19@77.819,71.508 77.819,69.374 78.613,68.58 91.255,68.58 92.166,67.669 92.166,49.494 91.186,48.514 U1.69@83.814,48.514
5V_Line_Motor_OA1: C21.2 CN10.1 U2.2 U2.3 U2.7 U2.8 | length 30.9
  Top Layer w0.508: U2.8@70.219,75.908 v3(72.39,75.908) ; U2.7@70.219,76.708 v3(72.39,76.708) ; U2.3@70.219,79.908 72.067,79.908 v2(72.219,79.756) ; U2.2@70.219,80.708 v2(72.266,80.708) ; C21.2@72.034,88.519 72.034,89.433 72.39,89.789 CN10.1@72.39,93.345
  Bottom Layer w1.27: v3(72.39,75.908) CN10.1@72.39,93.345
5V_Line_Motor_OA2: C22.2 CN10.2 U2.5 U2.6 U2.10 U2.11 | length 40.3
  Top Layer w0.508: U2.11@70.219,73.508 v3(73.812,73.508) ; U2.10@70.219,74.308 v3(73.819,74.308) ; U2.6@70.219,77.508 71.793,77.508 72.009,77.724 v3(73.914,77.724) ; U2.5@70.219,78.308 71.748,78.308 72.034,78.594 v3(73.914,78.594) ; C22.2@73.812,88.524 73.812,90.576 74.89,91.654 CN10.2@74.89,93.345
  Bottom Layer w1.27: v3@73.863,73.508 73.863,91.135 74.89,92.162 CN10.2@74.89,93.345
5V_Line_Motor_OB1: C24.2 CN10.3 U2.26 U2.27 U2.31 U2.32 | length 38.4
  Top Layer w0.508: CN10.3@77.39,93.345 77.39,91.513 78.424,90.479 C24.2@78.424,88.519 ; v3(78.424,75.908) U2.26@82.219,75.908 ; v3(78.424,76.708) U2.27@82.219,76.708 ; v3(78.486,79.883) 78.409,79.883 78.384,79.908 U2.31@82.219,79.908 ; v3(78.486,80.708) U2.32@82.219,80.708
  Bottom Layer w1.27: CN10.3@77.39,93.345 77.39,91.901 78.435,90.856 78.435,75.926 v3@78.417,75.908
5V_Line_Motor_OB2: C26.2 CN10.4 U2.23 U2.24 U2.28 U2.29 | length 34.6
  Top Layer w0.508: v3(79.883,73.508) U2.23@82.219,73.508 ; v3(79.883,74.295) 79.896,74.308 U2.24@82.219,74.308 ; v3(79.883,77.851) 80.226,77.508 U2.28@82.219,77.508 ; v3(79.883,78.994) 80.569,78.308 U2.29@82.219,78.308 ; CN10.4@79.891,93.345 79.891,91.178 80.199,90.87 C26.2@80.199,88.524
  Bottom Layer w1.27: v3@79.891,73.508 79.908,73.526 79.908,93.327 CN10.4@79.891,93.345
5V_Line_Motor_Step: U1.67 U2.42 | length 62.6
  Top Layer w0.254: U2.42@73.819,83.508 73.819,82.342 74.89,81.27 v3(75.095,81.27) ; U1.67@83.814,47.514 92.472,47.514 93.32,48.362 93.32,67.666 v3(93.345,67.691)
  Bottom Layer w0.254: v3@74.997,81.173 75.291,81.173 75.095,80.977 75.095,70.436 77.839,67.691 v3(93.345,67.691)
5V_MotorSen_1: CN15.10 U16.20 | length 45.2
  Top Layer w0.254: v3(37.338,49.022) 37.405,49.089 U16.20@37.405,51.181
  Bottom Layer w0.254: v3(37.338,49.022) 38.608,50.292 CN15.10@38.608,91.472
5V_PUMB_Con1: R13.2 U14.21 | length 36.3
  Top Layer w0.254: U14.21@107.083,71.755 107.083,69.974 107.727,69.33 119.812,69.33 120.615,70.133 120.615,76.138 121.115,76.638 131.829,76.638 132.522,77.331 R13.2@132.522,79.35
5V_Tap_Con1: R19.1 U14.20 | length 23.1
  Top Layer w0.254: U14.20@107.733,71.755 107.733,70.448 108.393,69.788 119.315,69.788 120.157,70.63 R19.1@120.157,79.397
5V_Tap_Con2: R20.1 U14.19 | length 15.6
  Top Layer w0.254: R20.1@99.622,79.52 99.622,76.908 100.203,76.327 107.442,76.327 108.383,75.386 U14.19@108.383,71.755
5V_Tmep_Ccon1: R14.1 U14.18 | length 7.8
  Top Layer w0.254: U14.18@109.033,71.755 109.033,76.267 109.782,77.016 R14.1@109.782,79.222
A+3.3V: C31.1 C33.1 C47.2 C48.2 C49.2 C50.2 C54.2 C68.2 C69.2 C70.2 C71.2 R34.1 R35.1 U4.2 U4.4 U8.2 U9.5 U10.5 U11.22 U12.5 U17.5 U18.5 U19.5 U20.5 U21.5 | length 51
  Top Layer w0.254: v2(3.429,88.9) C49.2@4.953,88.9 ; v3(4.953,80.457) U10.5@5.803,80.457 ; v3(5.334,78.74) C48.2@6.539,78.74 ; U12.5@8.051,75.25 8.051,74.753 8.571,74.233 C50.2@8.571,73.533 v2(8.571,72.263) ; U11.22@8.407,63.511 9.39,63.511 9.909,62.992 v3(11.241,62.992) C31.1@11.241,60.579 ; U8.2@9.596,84.504 v3(9.596,86.868) ; C69.2@10.733,26.035 10.733,25.208 11.311,24.63 U19.5@11.311,24.318 v2(12.319,24.318) ; C68.2@10.912,20.621 10.912,19.887 11.311,19.488 U18.5@11.311,18.857 v2(12.319,18.857) ; U9.5@10.914,80.457 10.914,79.535 11.524,79.535 11.746,79.313 C47.2@11.746,78.594 ; C71.2@10.922,15.24 10.922,14.416 11.311,14.027 U20.5@11.311,13.494 v2(12.319,13.495) ; U17.5@11.311,29.779 11.311,30.218 10.86,30.669 C70.2@10.86,31.623 v2(12.065,31.623) ; v2(19.431,87.571) R35.1@20.647,87.571 ; C54.2@20.32,66.41 20.466,66.556 U21.5@22.037,66.556 22.852,66.556 v2(22.86,66.548) ; R34.1@25.327,85.843 v2(26.543,85.843)
  Top Layer w0.508: U4.2@17.397,43.756 19.245,43.756 21.206,45.717 C33.1@22.126,45.717
  Top Layer w1.27: v3(6.167,43.756) v3(7.62,43.756) v3(8.89,43.756) U4.4@11.457,43.756 U4.2@17.397,43.756
  other v3: 10.922,79.527
A+5V: C29.1 C38.1 C39.2 C55.2 C56.2 CN14.3 U4.3 U7.6 U13.7 | length 54.4
  Top Layer w0.381: U13.7@23.614,72.68 23.614,71.461 24.003,71.073 C55.2@24.003,70.234 C56.2@25.781,70.234
  Top Layer w0.508: U4.3@17.397,46.056 17.397,47.627 16.891,48.133 16.891,50.613 v3(19.304,50.613) ; C56.2@25.781,70.234 26.921,70.234 v3(26.924,70.231)
  Top Layer w1.27: C39.2@123.149,7.594 123.193,7.638 C38.1@123.193,12.093 123.193,14.481 126.238,17.526 U7.6@126.238,20.955
  Bottom Layer w0.508: v3(19.304,50.613) 19.304,69.85 19.685,70.231 v3(26.924,70.231)
A-5V: C45.1 C46.2 C60.1 C61.1 CN14.5 U7.8 U13.4 | length 73.7
  Top Layer w0.508: v3(17.78,75.946) C60.1@18.796,75.946 ; C61.1@18.796,74.168 C60.1@18.796,75.946 ; U13.4@21.074,78.225 21.074,76.172 20.849,75.946 C60.1@18.796,75.946
  Top Layer w1.27: C45.1@119.644,7.493 119.646,7.495 C46.2@119.646,12.093 119.646,14.998 121.158,16.51 U7.8@121.158,20.955
  Bottom Layer w0.508: CN14.5@16.637,26.765 18.383,26.765 19.812,28.194 19.812,33.782 17.78,35.814 v3(17.78,75.946)
AD7124_CS: R30.1 U1.132 U11.4 | length 71.7
  Top Layer w0.254: U11.4@14.453,64.161 16.607,64.161 18.335,62.433 26.224,62.433 26.355,62.303 R30.1@27.355,62.303 ; R30.1@27.584,62.303 R30.1@27.355,62.303 ; U1.132@62.214,38.514 62.184,38.484 60.355,38.484 59.844,37.973 52.578,37.973 51.054,39.497 28.575,39.497 27.559,40.513 27.559,62.099 R30.1@27.355,62.303
AD7124_SYNC1: R29.1 U11.23 | length 7.4
  Top Layer w0.254: U11.23@8.407,62.861 9.275,62.861 9.833,62.303 v2(10.541,62.303) ; v3(10.541,58.268) R29.1@11.503,58.268
  Bottom Layer w0.254: v3(10.541,58.268) v2(10.541,62.303)
BOOT0: R2.1 U1.138 | length 3.6
  Top Layer w0.254: R2.1@58.601,35.539 58.626,35.514 U1.138@62.214,35.514
Cpu_LED: R6.2 U1.80 | length 47.5
  Top Layer w0.254: R6.2@54.864,80.485 54.864,74.295 55.677,73.482 57.339,73.482 60.147,70.674 60.147,63.943 60.895,63.195 68.642,63.195 69.721,62.116 69.721,59.311 70.485,58.547 77.152,58.547 78.264,57.435 U1.80@78.264,52.064
D+3.3V: C6.1 C7.1 C8.1 C9.1 C10.1 C11.1 C12.1 C13.1 C14.1 C15.1 C16.1 C17.1 C30.1 C32.1 C62.2 C64.2 C66.2 CN7.1 CN8.1 CN9.1 FPC1.2 FPC2.2 R1.2 R3.1 R4.2 R29.2 R30.2 U1.6 U1.17 U1.30 U1.32 U1.33 U1.39 U1.52 U1.62 U1.72 U1.84 U1.95 U1.108 U1.121 U1.131 U1.144 U3.2 U3.4 U11.6 U14.1 U14.2 U15.1 U15.2 U16.1 | length 148.2
  Top Layer w0.254: R29.2@13.01,58.268 13.01,56.967 13.716,56.261 17.018,56.261 ; U11.6@14.509,65.405 U11.6@14.453,65.461 v2(17.018,65.461) v2@17.119,65.461 ; v2(17.018,57.023) 17.018,56.261 ; v3(21.844,56.261) 17.018,56.261 ; R30.2@27.584,63.81 27.64,63.754 v2@31.734,63.754 ; v2@31.679,63.81 v2@31.734,63.754 ; v2(31.734,77.978) 34.417,77.978 35.044,77.351 U15.1@35.044,75.87 U15.2@35.694,75.87 ; v2(31.75,63.754) v2@31.734,63.754 ; v2(32.004,47.309) C62.2@33.274,47.309 34.313,47.309 34.805,46.817 U16.1@34.805,45.136 ; CN9.1@37.592,24.535 38.632,24.535 39.626,25.529 R4.2@41.148,25.529 ; v2(55.713,34.138) R3.1@57.096,34.138 ; C16.1@58.358,38.989 58.383,39.014 v3(59.69,39.014) U1.131@62.214,39.014 ; C15.1@58.42,43.942 58.492,44.014 v2(59.817,44.014) U1.121@62.214,44.014 ; C17.1@58.485,32.514 v3(59.844,32.514) U1.144@62.214,32.514 ; v3(61.976,55.039) 61.99,55.053 C14.1@63.5,55.053 63.5,54.328 64.264,53.564 U1.108@64.264,52.064 ; U1.95@70.764,52.064 v2(70.764,53.975) C13.1@70.764,55.245 ; U1.17@72.264,30.464 72.264,27.881 C6.1@72.266,27.879 v2(73.533,27.879) ; v2(74.619,55.245) C12.1@76.2,55.245 76.2,53.404 76.264,53.34 U1.84@76.264,52.064 ; v2(77.597,27.813) C7.1@78.802,27.813 78.764,27.851 U1.30@78.764,30.464 ; U1.32@79.764,30.464 U1.33@80.264,30.464 80.264,29.337 v2(80.772,28.829) ; U1.39@83.814,33.514 C8.1@88.011,33.514 88.011,34.655 v3(88.027,34.671) ; U1.52@83.814,40.014 C9.1@88.115,40.014 88.115,41.125 v3(88.138,41.148) ; U1.62@83.814,45.014 86.05,45.014 v3(86.741,44.323) C10.1@88.138,44.323 ; U1.72@83.814,50.014 85.32,50.014 85.979,50.673 85.979,52.959 86.36,53.34 C11.1@87.568,53.34 v2(87.568,54.483) ; R1.2@90.424,23.513 90.442,23.495 v2(91.694,23.495) ; C64.2@103.505,67.756 v2(105.729,67.756) 105.783,67.81 U14.2@105.783,65.71 U14.1@105.133,65.71
  Top Layer w0.305: v2(64.77,28.067) 66.167,28.067 66.764,28.664 U1.6@66.764,30.464 ; FPC1.2@69.242,3.381 69.242,4.345 69.85,4.953 v4(71.764,4.953) ; FPC2.2@98.393,3.429 98.393,2.445 98.552,2.286 v4(98.679,2.286)
  Top Layer w0.508: v3(113.665,46.383) C32.1@116.335,46.383 116.335,45.209 117.664,43.88 C30.1@117.664,42.545
  Top Layer w1.27: v5(110.49,52.832) U3.4@116.205,52.832 U3.2@122.145,52.832
  Bottom Layer w0.254: v2(17.018,57.023) v2(17.018,65.461) ; v2(31.734,77.978) 31.734,72.321 31.826,72.229 31.826,70.244 31.801,70.219 31.801,69.735 31.826,69.71 31.826,63.83 v2(31.75,63.754)
  other v5: 113.157,52.832
D+5V: C25.1 C28.1 C63.1 C65.1 C67.1 C72.2 C73.2 C74.2 C75.2 CN14.1 CN15.7 D5.1 D6.1 Q1.3 Q6.3 Q8.3 R32.2 R40.2 R49.2 R56.2 R59.2 R60.2 U2.40 U3.3 U5.3 U14.23 U14.24 U15.23 U15.24 U16.23 U16.24 U22.5 U23.5 U24.5 U25.5 | length 219.6
  Top Layer w0.381: v2(31.877,80.137) 34.783,80.137 35.044,80.398 U15.24@35.044,81.915 U15.23@35.694,81.915 ; v2(32.004,49.719) C63.1@33.401,49.719 34.347,49.719 34.805,50.178 U16.24@34.805,51.181 U16.23@35.455,51.181 ; v2(33.72,70.231) C72.2@33.72,68.834 33.72,68.191 34.044,67.867 U22.5@34.044,67.196 ; R32.2@35.585,69.017 v2(35.585,70.234) ; v2(39.37,70.231) C74.2@39.37,69.088 39.37,68.285 39.759,67.896 U24.5@39.759,67.323 ; R59.2@41.452,69.144 v2(41.452,70.231) ; v2(45.658,69.977) C73.2@45.658,68.834 45.658,68.261 46.236,67.683 U23.5@46.236,67.196 ; R56.2@47.904,69.017 v2(47.904,69.977) ; v2(51.689,70.104) C75.2@51.689,68.707 51.689,67.764 52.384,67.069 U25.5@52.384,66.797 ; R60.2@54,68.763 v2(54,70.104) ; Q1.3@57.492,82.904 57.492,84.149 v2(57.531,84.188) ; v2(69.85,86.777) 70.508,86.777 70.726,86.995 73.787,86.995 74.106,86.676 C25.1@74.106,85.775 75.035,85.775 75.419,85.391 U2.40@75.419,83.508 ; C65.1@103.505,69.658 103.567,69.596 v2(105.133,69.596) U14.24@105.133,71.755 U14.23@105.783,71.755 ; C28.1@120.647,59.408 120.647,57.534 122.145,56.036 U3.3@122.145,55.132
  Top Layer w0.508: CN14.1@16.637,30.765 v2(30.988,30.765) ; Q6.3@61.175,11.784 61.175,16.263 62.692,17.78 70.485,17.78 ; D6.1@68.513,16.418 70.452,16.418 R49.2@70.472,16.439 70.485,16.451 70.485,17.78 ; Q8.3@92.29,12.927 92.29,17.692 92.202,17.78 ; D5.1@100.39,17.688 102.436,17.688 R40.2@102.489,17.635 102.489,26.162 102.616,26.289 ; v2(121.031,43.942) 121.031,27.94 119.38,26.289 102.616,26.289 ; U3.3@122.145,55.132 v4(124.903,55.132) ; 70.485,17.78 92.202,17.78 ; 92.202,17.78 92.986,17.78 93.853,18.647 93.853,23.749 96.393,26.289 102.616,26.289
  Bottom Layer w0.381: 30.988,49.719 v2(32.004,49.719) ; CN15.7@32.608,91.472 32.608,85.248 v2(32.639,85.217)
  Bottom Layer w0.508: v2(30.988,30.765) 30.988,49.719 v6(30.988,71.882)